# Allegro board ptmd_pcb20141102_2215.brd
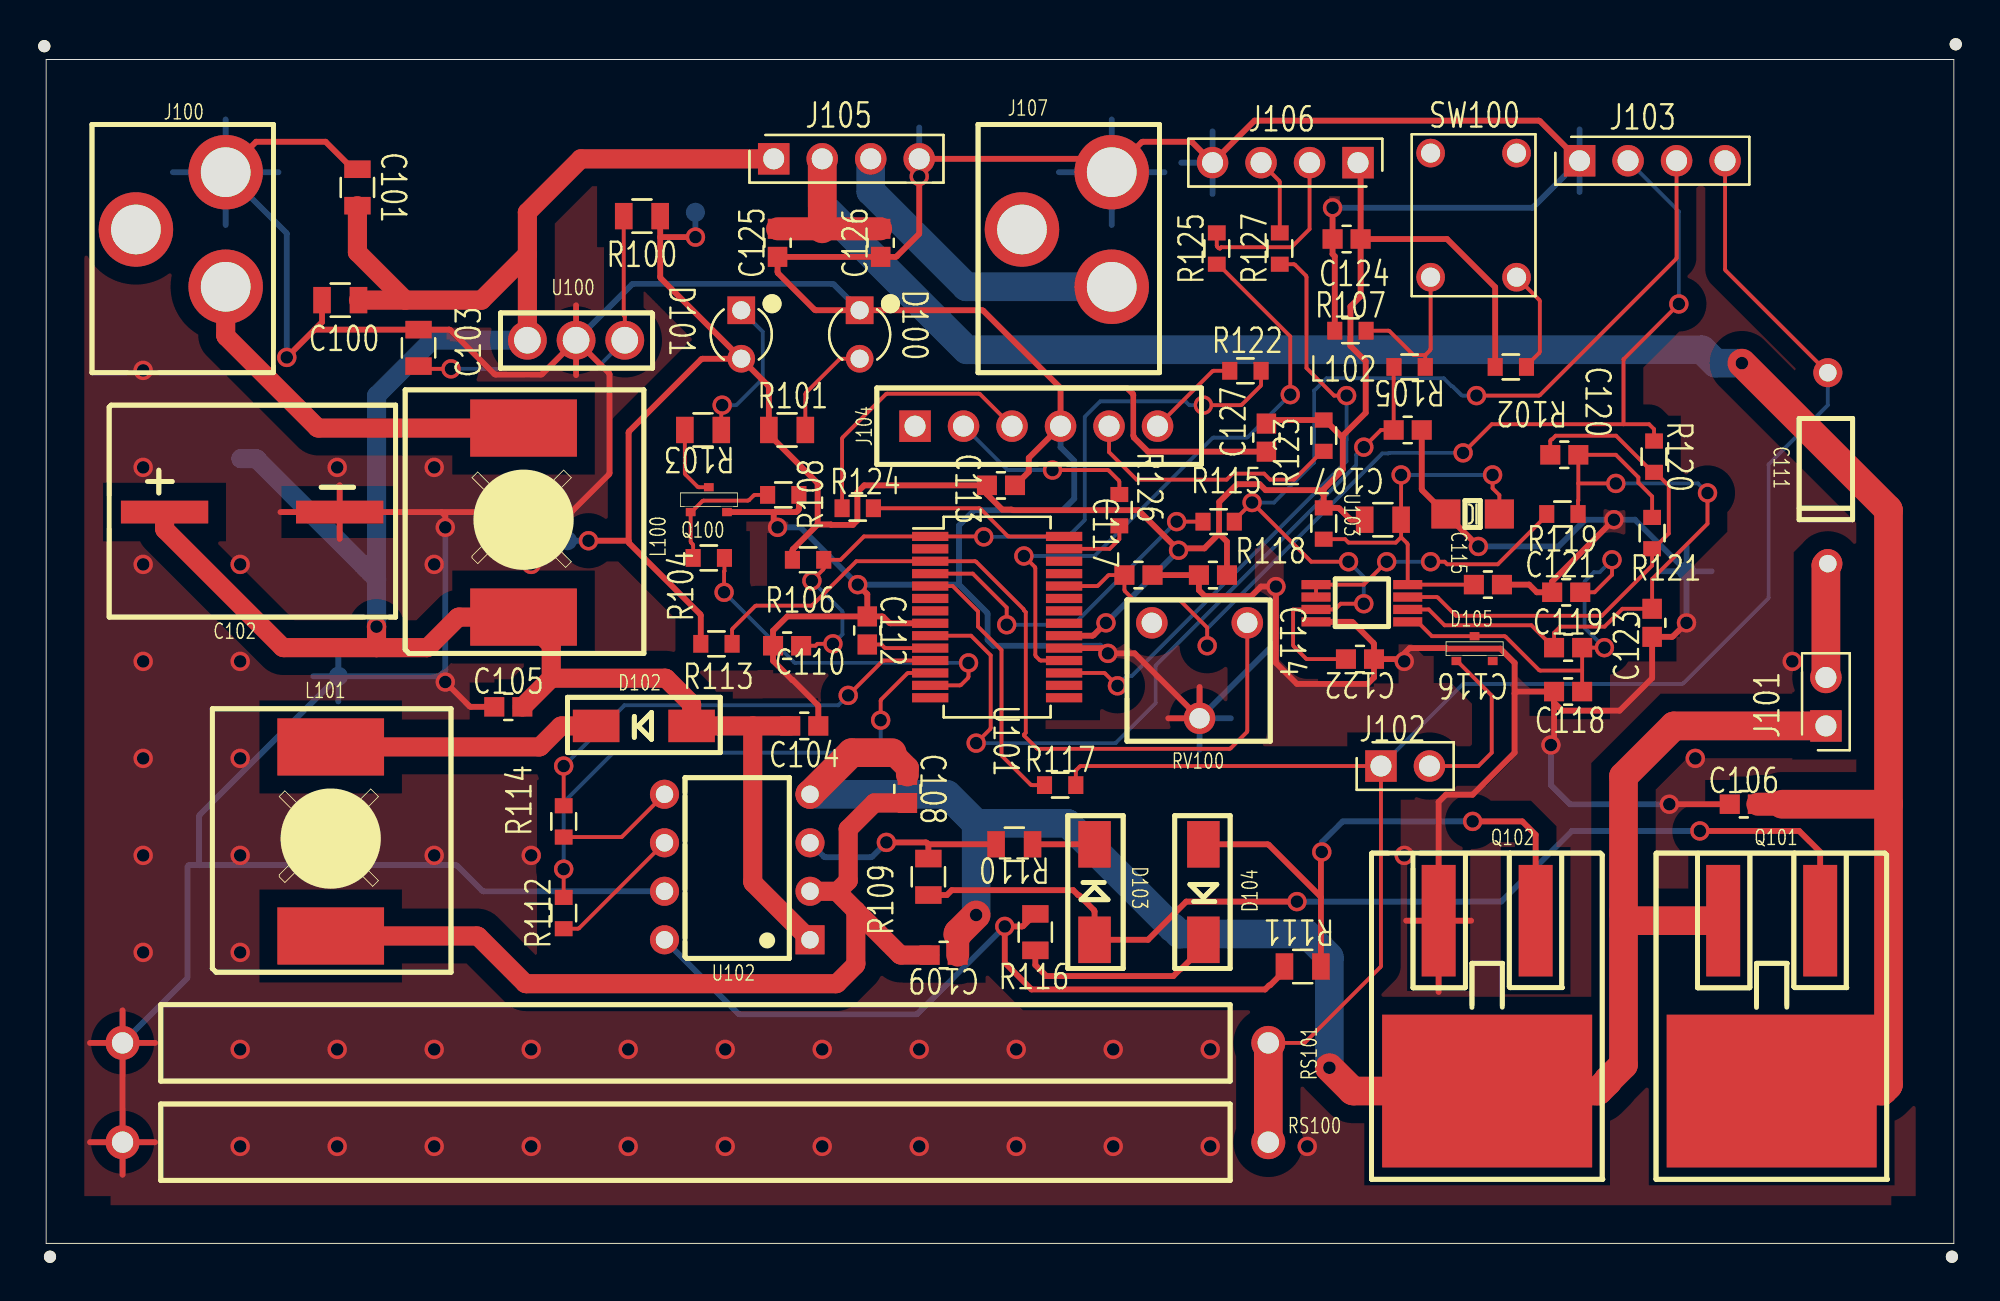
[diagram p0: board, top side]
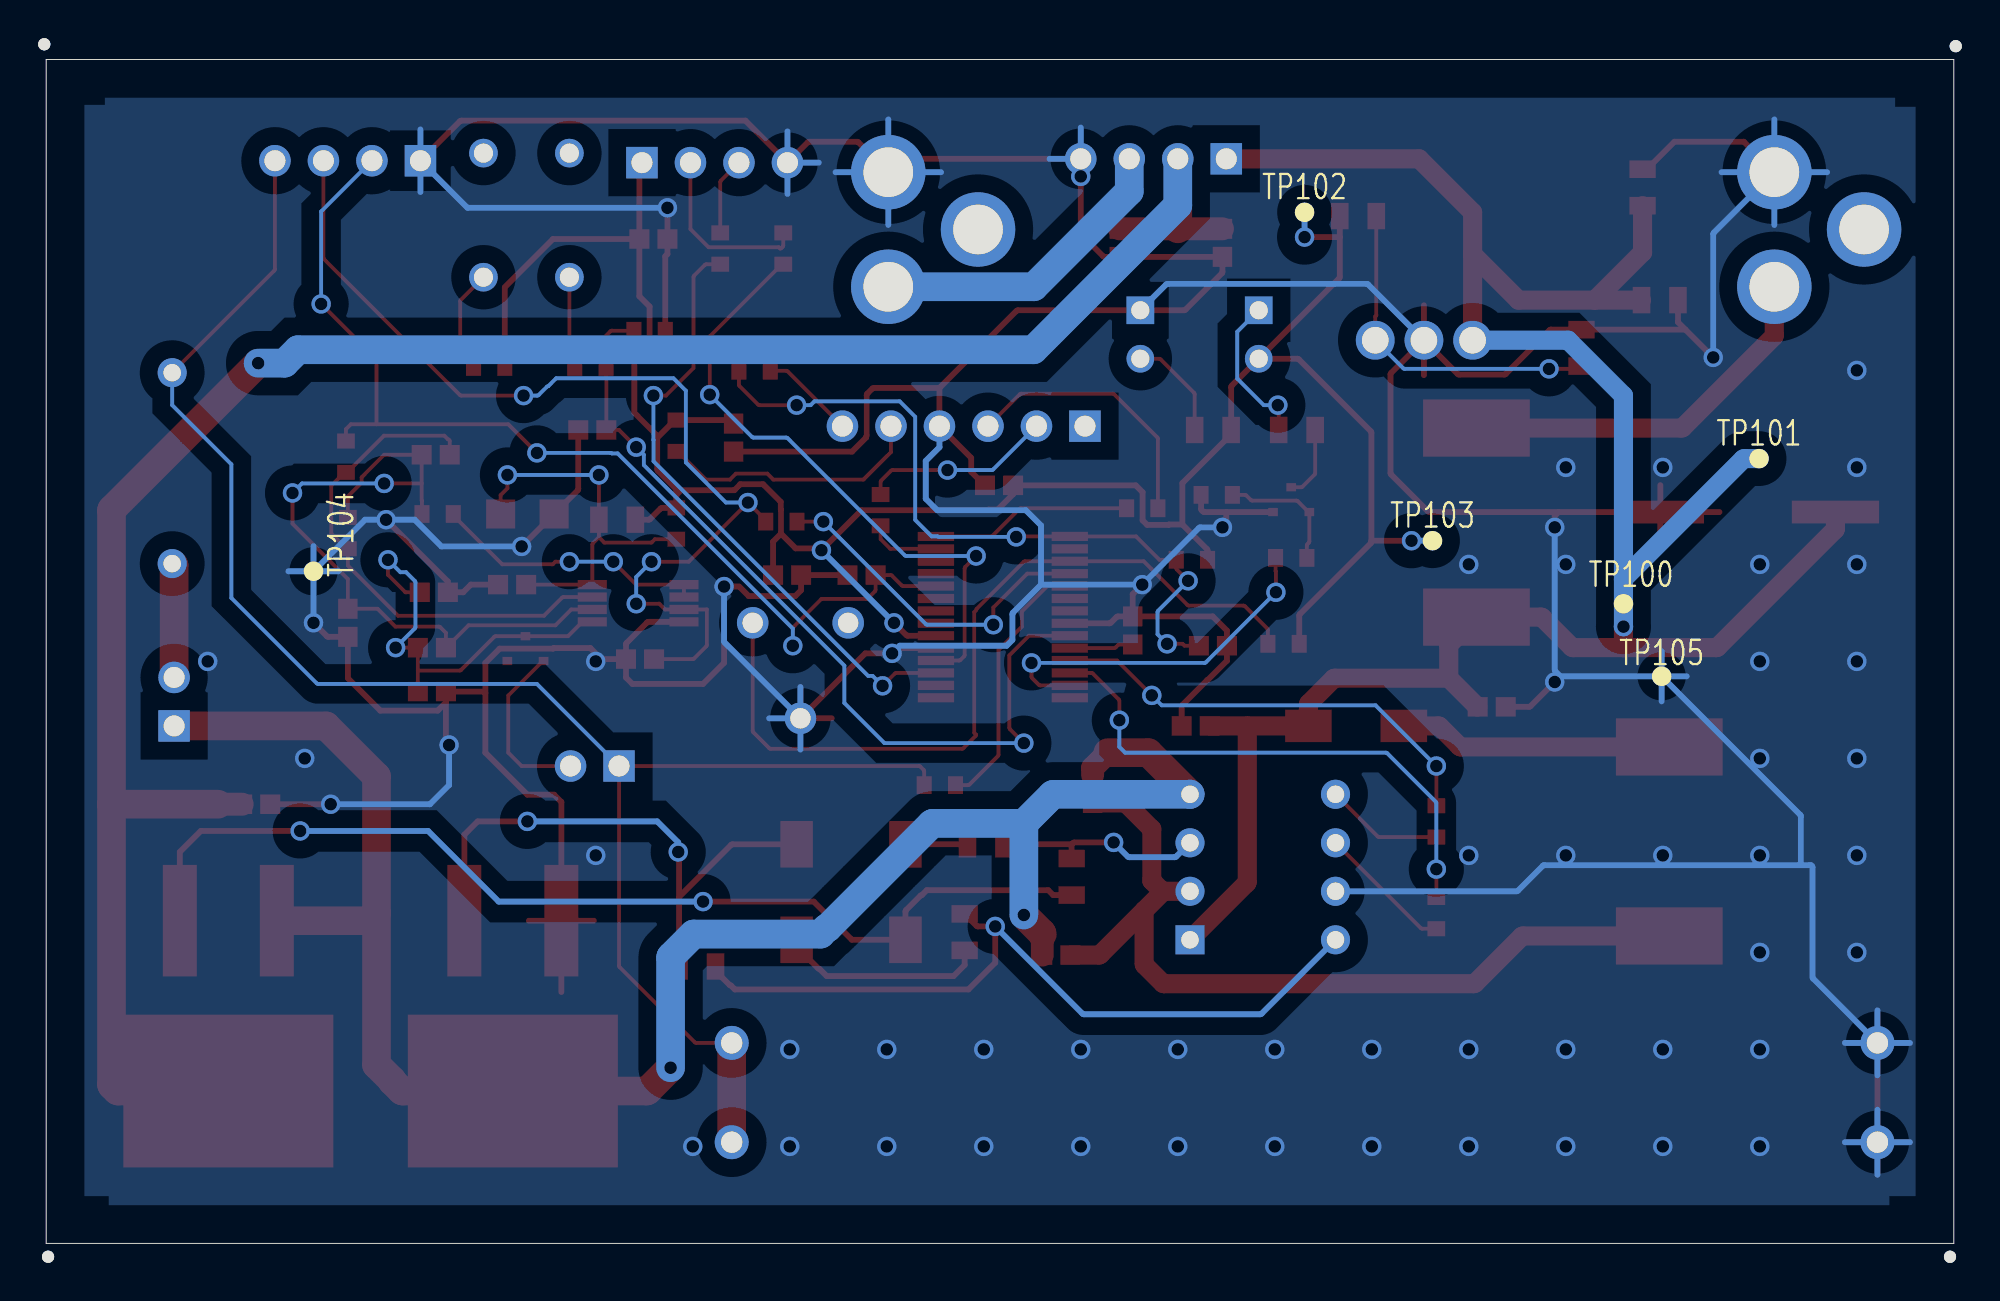
[diagram p1: board, bottom side, seen from below]

Outline 99.9 x 62 mm; copper layers: TOP, BOTTOM. Coordinates in mm from the lower left corner of the outline.
Outline path: 0,62 0,0 99.9,0 99.9,62 0,62

## Design rules (mm)
nets with their own width: min track width 0.305; nets GND IR2011_LO N13254717 N13254741 N13254867 N13255229 N13255269 VCC_5V
nets with their own width: min track width 1; nets N13254415 N13255963 N13257345 VCC_12V
nets with their own width: min track width 1.5; nets N13255311 N13255625 V_EXT_24V/12V VSEN_1

## Placement (name value [footprint] x y rotation side)
C100  10uF  [RES0805]  15.4 49.4 0 top
C101  100nF  [RES0805]  16.3 55.3 270 top
C102  330uF  [ALUMIUM_330UF_TUTAO]  6.2 38.3 0 top
C103  100nF  [RES0805]  19.5 46.9 270 top
C104  100nF  [CAP0603]  39.7 27.1 180 top
C105  100nF  [CAP0603]  24.2 28.1 0 top
C106  100nF  [CAP0603]  88.9 23 0 top
C107  100nF  [CAP0603]  71.3 42.6 180 top
C108  10pF  [CAP0603]  45.1 23.8 270 top
C109  100nF  [CAP0603]  47 15.1 180 top
C110  100nF  [CAP0603]  38.8 31.3 0 top
C111  2uF  [1N4007_TUTAO]  93.3 45.6 270 top
C112  1uF  [CAP0603]  43 32.1 270 top
C113  1uF  [CAP0603]  50 39.7 180 top
C114  100nF  [CAP0603]  61.1 35 0 top
C115  6.8uF  [C1206_TUTAO]  76.1 38.2 180 top
C116  100nF  [CAP0603]  75.5 34.5 180 top
C117  100nF  [CAP0603]  57.2 35 180 top
C118  10pF  [CAP0603]  79.7 28.9 180 top
C119  10pF  [CAP0603]  79.7 31.2 0 top
C120  100nF  [CAP0603]  79.5 41.3 0 top
C121  100nF  [CAP0603]  79.6 34.1 0 top
C122  100nF  [CAP0603]  68.8 30.6 180 top
C123  10pF  [CAP0603]  84.1 32.5 90 top
C124  100nF  [CAP0603]  68.1 52.6 0 top
C125  1uF  [CAP0603]  38.3 52.4 90 top
C126  100nF  [CAP0603]  43.7 52.4 90 top
C127  100nF  [CAP0603]  63.9 42.2 90 top
D100  LED  [LED3MM]  42.6 47.6 270 top
D101  LED  [LED3MM]  36.4 47.6 270 top
D102  SS34  [1N4007_SMD]  28.8 27.1 0 top
D103  1N4007  [1N4007_SMD]  54.9 20.9 270 top
D104  1N4007  [1N4007_SMD]  60.6 15.9 90 top
D105  BAT54/SOT  [SOT23_TUTAO]  74.8 31.8 0 top
J100  Jack DC  [DC-JACK]  9.4 50.1 0 top
J101  Inductor Conn  [HEADER2PINMALE]  93.2 27.1 90 top
J102  Signal Conn  [HEADER2PINMALE]  69.9 25 0 top
J103  SIGNAL_TEST_CONN  [HEADER4PINMALE]  80.3 56.7 0 top
J104  ICSP  [HEADER6PINMALE]  45.5 42.8 0 top
J105  Power_Sel_Conn  [HEADER4PINMALE]  38.1 56.8 0 top
J106  UART_CONN  [HEADER4PINMALE]  68.7 56.6 180 top
J107  Jack DC  [DC-JACK]  55.8 50.1 0 top
L100  L127H-150M  [INDUCTOR_TUTAO]  25 42.7 0 top
L101  L127H-150M  [INDUCTOR_TUTAO]  14.9 26 0 top
L102  Bead  [RES0805]  70 37.9 0 top
NOREF  -  [unnamed]  100 62.8 0 top
NOREF#2  -  [#2]  -6.2 -2.5 90 top
NOREF#3  -  [unnamed]  99.8 -0.7 0 top
NOREF#4  -  [#2]  -2.5 70.2 0 top
NOREF#5  -  [#2]  -349 -266.2 0 top
NOREF#6  -  [#2]  1 80.3 0 top
NOREF#7  -  [#2]  1 81.5 0 top
NOREF#8  -  [#2]  1 1 90 top
NOREF#9  -  [#2]  -349 -266.2 0 top
NOREF#10  -  [unnamed]  0.2 -0.7 0 top
NOREF#11  -  [unnamed]  -0.1 62.7 0 top
Q100  MMBT2222A  [SOT23_TUTAO]  34.7 39.6 0 top
Q101  SUB85N03-07P  [TO263_TUTAO]  92.9 16.9 180 top
Q102  SUB85N03-07P  [TO263_TUTAO]  78 16.9 180 top
R100  0R  [RES0805]  31.2 53.8 0 top
R101  330R  [RES0805]  38.8 42.6 0 top
R102  1K  [RESC0603]  76.7 45.9 180 top
R103  330R  [RES0805]  34.4 42.6 180 top
R104  3.3K  [RESC0603]  34.7 35.9 180 top
R105  100R  [RESC0603]  71.4 45.9 180 top
R106  10K  [RESC0603]  39.9 35.8 180 top
R107  100K  [RESC0603]  68.3 47.8 0 top
R108  10K  [RESC0603]  38.6 39.2 180 top
R109  1K  [RES0805]  46.2 19.2 270 top
R110  100R  [RES0805]  50.7 20.9 180 top
R111  1K  [RES0805]  65.8 14.5 0 top
R112  330R  [RESC0603]  27.1 17.3 90 top
R113  1K  [RESC0603]  35.1 31.4 180 top
R114  330R  [RESC0603]  27.1 22.1 90 top
R115  27R  [RESC0603]  61.4 37.8 0 top
R116  100R  [RES0805]  51.8 16.3 90 top
R117  27R  [RESC0603]  53.1 24 0 top
R118  0R  [RESC0603]  66.9 37.7 90 top
R119  2.2K  [RESC0603]  79.4 38.2 180 top
R120  100R  [RESC0603]  84.2 41.2 270 top
R121  22K  [RESC0603]  84.1 37.2 90 top
R122  100R  [RESC0603]  62.8 45.7 0 top
R123  0R  [RESC0603]  66.9 42.3 90 top
R124  100R  [RESC0603]  42.5 38.5 0 top
R125  100R  [RESC0603]  61.3 52.1 90 top
R126  100R  [RESC0603]  56.2 38.4 270 top
R127  100R  [RESC0603]  64.6 52.1 90 top
RS100  0.22R  [POWER_RES]  4 5.3 0 top
RS101  0.22R  [POWER_RES]  4 10.5 0 top
RV100  1K  [VR3]  60.4 27.5 180 top
SW100  SW_TC_SPST  [BUTTON_KAN0611-1201B]  72.5 50.6 270 top
TP100  TEST POINT  [TP_TP]  17.3 33.5 180 bottom
TP101  TEST POINT  [TP_TP]  10.2 41.1 180 bottom
TP102  TEST POINT  [TP_TP]  34 54 180 bottom
TP103  TEST POINT  [TP_TP]  27.3 36.8 180 bottom
TP104  TEST POINT  [TP_TP]  85.9 35.2 180 bottom
TP105  TEST POINT  [TP_TP]  15.3 29.7 180 bottom
U100  7805/TO  [TO20AB_TUTAO]  25.2 47.3 180 top
U101  PIC16LF1788/9  [SSOP28_TUTAO]  49.8 32.8 270 top
U102  IR2011  [DIP8_TUTAO]  40 15.9 180 top
U103  LMV358IDGKR  [VSSOP_TUTAO]  66.5 34.5 0 top

## Library data of the parts
C100 C101 C103 = C: room: PWR
C102 = CAPACITOR POL: User Part Number: ***; room: PWR
C104-C106 C108 C109 = CAP NP: room: Driver
C107 = CAP NP: room: LED
C110 C112-C114 C117 = CAP NP: room: MCU
C111 = C: User Part Number: ***; room: Driver
C115 = CAP: User Part Number: ***; room: Signal
C116 C118-C123 = CAP NP: room: Signal
C124-C127 = CAP NP: room: Conn
D100 = LED_0: room: PWR
D101 = LED_0
D102 = DIODE_0: User Part Number: ***; room: Driver
D103 D104 = DIODE: User Part Number: ***; room: Driver
D105 = BAT54/SOT_0: User Part Number: ***; room: Signal
J100 = Jack DC: User Part Number: ***; room: PWR
J101 = CON2: room: Driver
J102 = CON2: room: Signal
J103 = CON4: room: TP
J104 = CONNECTOR EDGE 5_0: User Part Number: ***; room: Conn
J105 J106 = CON4: room: Conn
J107 = Jack DC: User Part Number: ***; room: Conn
L100 = CHOKE: User Part Number: ***; room: PWR
L101 = CHOKE: User Part Number: ***; room: Driver
L102 = CHOKE: room: Signal
Q100 = MMBT2222A/SOT_0: User Part Number: ***; room: LED
Q101 Q102 = IRF540N/TO_0: User Part Number: ***; room: Driver
R100 = RESISTOR: room: PWR
R101 = R: room: PWR
R102 R103 R107 R108 = R: room: LED
R104 = RESISTOR_0: room: LED
R105 = RESISTOR: room: LED
R106 R113 R115 R117 = R: room: MCU
R109 R111 R112 R114 = R: room: Driver
R110 R116 = RESISTOR: room: Driver
R118-R121 = RESISTOR: room: Signal
R122-R127 = RESISTOR: room: Conn
RS100 RS101 = R: User Part Number: ***; room: Driver
RV100 = VARISTOR_1: User Part Number: ***; room: MCU
SW100 = SW_TC_SPST: room: LED
TP100-TP105 = TEST POINT: room: TP
U100 = 78XX/TO_0: User Part Number: ***; room: PWR
U101 = PIC16F1788_0: room: MCU
U102 = IR2011: User Part Number: ***; room: Driver
U103 = LMV358/SO: User Part Number: ***; room: Signal

## Footprints (pads in the part's own frame, mm; a bottom-side part is the same pattern mirrored in y, then rotated)
1N4007_SMD
  rect 2.438x1.702 smd: 1(0,0) 2(5,0)
1N4007_TUTAO
  round 1.524 hole 0.914: 1(0,0) 2(10,0)
ALUMIUM_330UF_TUTAO
  rect 4.572x1.194 smd: 1(0,0) 2(9.17,0)
BUTTON_KAN0611-1201B
  round 1.5 hole 1: 1(0,4.5) 2(-6.5,4.5) 3(0,0) 4(-6.5,0)
C1206_TUTAO
  rect 1.524x1.524 smd: 1(0,0) 2(2.8,0)
CAP0603
  rect 1.05x1.02 smd: 1(-0.735,0) 2(0.735,0)
DC-JACK
  round 3.9 hole 2.6: 1(0,0) 2(0,6) 3(-4.7,3)
DIP8_TUTAO
  rect 1.524x1.524 hole 0.914: 1(0,0)
  round 1.524 hole 0.914: 2(0,-2.54) 3(0,-5.08) 4(0,-7.62) 5(7.62,-7.62) 6(7.62,-5.08) 7(7.62,-2.54) 8(7.62,0)
HEADER2PINMALE
  rect 1.65x1.65 hole 1.1: 1(0,0)
  round 1.65 hole 1.1: 2(2.54,0)
HEADER4PINMALE
  rect 1.65x1.65 hole 1.1: 1(0,0)
  round 1.65 hole 1.1: 2(2.54,0) 3(5.08,0) 4(7.62,0)
HEADER6PINMALE
  rect 1.65x1.65 hole 1.1: 1(0,0)
  round 1.65 hole 1.1: 2(2.54,0) 3(5.08,0) 4(7.62,0) 5(10.16,0) 6(12.7,0)
INDUCTOR_TUTAO
  rect 5.588x2.997 smd: 1(0,0) 2(0,-9.9)
LED3MM
  round 1.45 hole 0.95: A(1.27,0)
  rect 1.45x1.45 hole 0.95: C(-1.27,0)
POWER_RES
  round 1.778 hole 1.118: 1(0,0) 2(60,0)
RES0805
  rect 0.92x1.38 smd: 1(-0.955,0) 2(0.955,0)
RESC0603
  rect 0.79x0.93 smd: 1(-0.82,0) 2(0.82,0)
SOT23_TUTAO
  rect 0.508x0.432 smd: 1(-0.95,-1.3) 2(0.95,-1.3) 3(0,0)
SSOP28_TUTAO
  rect 0.48x1.9 smd: 1(-4.225,-3.505) 2(-3.575,-3.505) 3(-2.925,-3.505) 4(-2.275,-3.505) 5(-1.625,-3.505) 6(-0.975,-3.505) 7(-0.325,-3.505) 8(0.325,-3.505) 9(0.975,-3.505) 10(1.625,-3.505) 11(2.275,-3.505) 12(2.925,-3.505) 13(3.575,-3.505) 14(4.225,-3.505) 15(4.225,3.505) 16(3.575,3.505) 17(2.925,3.505) 18(2.275,3.505) 19(1.625,3.505) 20(0.975,3.505) 21(0.325,3.505) 22(-0.325,3.505) 23(-0.975,3.505) 24(-1.625,3.505) 25(-2.275,3.505) 26(-2.925,3.505) 27(-3.575,3.505) 28(-4.225,3.505)
TO20AB_TUTAO
  round 2.032 hole 1.397: 1(0,0) 2(-2.55,0) 3(-5.1,0)
TO263_TUTAO
  rect 1.778x5.842 smd: 1(0,0) 3(5.08,0)
  rect 10.998x8.001 smd: 2(2.54,8.921)
TP_TP
  round 1 smd: 1(0,0)
unnamed
  round 0.635 hole 3.175 unplated: (0,0)
VR3
  round 1.651 hole 1.067: 1(-2.5,-5) 2(0,0) 3(2.5,-5)
VSSOP_TUTAO
  rect 1.524x0.483 smd: 1(0,0) 2(0,-0.65) 3(0,-1.3) 4(0,-1.95) 5(4.8,-1.95) 6(4.8,-1.3) 7(4.8,-0.65) 8(4.8,0)

## Nets
2.5V: R113.1 RV100.1 U101.3(C1IN1-)
GND: C100.1 C101.1 C102.2 C103.1 C104.1 C105.1 C106.1 C107.1 C110.1 C112.1 C113.1 C114.1 C115.2 C116.1 C117.1 C118.2 C121.1 C122.1 C123.1 C124.1 C125.1 C126.1 C127.1 D100.C(CATHODE) J100.2(GND) J103.1 J104.4 J105.4 J106.4 J107.2(GND) Q100.2(E) Q102.3(S) R107.1 R108.1 RS100.1 RS101.1 RV100.2 TP104.1 TP105.1 U100.2(GND) U101.8(VSS) U101.19(VSS1) U102.7(COM) U103.4(-VCC)
V_EXT_24V/12V: C106.2 C125.2 C126.2 J105.2 Q101.2(D)
VCC_5V: C113.2 C114.2 C124.2 C127.2 D101.A(ANODE) J106.1 L102.1 R100.2 R101.1 R102.2 R106.2 R113.2 R118.2 R123.2 TP102.1 TP103.1 U101.20(VDD)
VCC_12V: C100.2 C101.2 C102.1 C104.2 C105.2 D102.2(A) J105.1 L100.2 TP100.1 TP101.1 U100.1(VIN) U102.1(VCC)
HI_INPUT: R114.2 U101.11(PSMC1A)
ICSPCLK: R126.2 U101.27(ICSPCLK)
ICSPDAT: R124.2 U101.28(ICSPDAT)
IR2011_LO: R111.1 R116.2 U102.8(LO)
LED: R104.1(2) U101.13(CCP1)
LI_INPUT: R112.2 U101.12(PSMC1B)
RESET: C110.2 R106.1 R122.2 U101.1(VPP/M\C\L\R\)
RX: R125.1 U101.18(RX)
TX: R127.1 U101.17(TX)
UCAL: C107.2 R105.2 U101.9(RA7)
VOFFSET: C122.2 J103.3 R115.2 U103.3(+VIN)
VSEN: C117.2 J103.2 R120.1 U101.24(AN9)
VSEN_1: C111.1 J102.1 J103.4 R117.2 RS100.2 RS101.2
N13254239: J105.3 J107.1(VCC)
N13254275: C120.1 R120.2 R121.1 U103.7(OUTPUT)
N13254303: C115.1 C116.2 L102.2 R118.1 U103.8(+VCC)
N13254321: C118.1 C119.2 C121.2 D105.3(CATHODE) U103.5(+VIN)
N13254399: C119.1 C120.2 C123.2 R119.1 R121.2 U103.6(-VIN)
N13254415: C108.2 C109.2 L101.2 U102.2(VB)
N13254529: C112.2 U101.10(VCAP)
N13254717: D103.1(K) R110.1
N13254741: D103.2(A) Q101.1(G) R109.2
N13254867: D104.2(A) Q102.1(G) R111.2
N13254889: C103.2 R100.1 U100.3(VOUT)
N13255179: D105.1(ANODE) J102.2
N13255229: D104.1(K) R116.1
N13255269: R109.1 R110.2 U102.3(HO)
N13255311: C111.2 J101.2
N13255335: R102.1 SW100.1
N13255523: Q100.1(B) R104.2(1) R108.2
N13255625: C108.1 C109.1 J101.1 Q101.3(S) Q102.2(D) U102.4(VS)
N13255733: R119.2 U103.1(OUTPUT) U103.2(-VIN)
N13255819: J104.6 R122.1
N13255963: D102.1(K) L101.1
N13256241: R105.1 R107.2 SW100.3
N13256275: R115.1 U101.4(C2IN0+)
N13256585: R112.1 U102.6(LIN)
N13256589: R114.1 U102.5(HIN)
N13257127: Q100.3(C) R103.2
N13257143: D101.C(CATHODE) R103.1
N13257239: J106.2 R125.2
N13257243: J106.3 R127.2
N13257333: D100.A(ANODE) R101.2
N13257345: J100.1(VCC) L100.1
N13257381: J104.5 R123.1
N13257397: J104.3 R124.1
N13257431: J104.2 R126.1
N13260157: R117.1 U101.5(C1IN1+)

Pads without a net: D105 2; J100 3; J104 1; J107 3; RV100 3; SW100 2 4; U101 2 6 7 14 15 16 21 22 23 25 26

## Via types
v1: diameter 1.016, hole 0.66, TOP to BOTTOM, 110 vias

## Routing (per net, layer and track width the routed paths; a pad name or vN(x,y) marks a point on that pad's centre or on a via; arc(x,y) is an arc through that point)
2.5V: length 43.3
  TOP w0.2: R113.1 35.92,32.13 arc(35.93,32.17) 35.95,32.2 37.12,33.37 arc(37.15,33.39) 37.19,33.4 40.06,33.4 arc(40.1,33.41) 40.13,33.43 42.03,35.33 42.43,35.73 U101.3 48.63,35.73 arc(48.67,35.72) 48.7,35.7 51.17,33.23 arc(51.19,33.2) 51.2,33.16 51.3,33.06 51.3,26.74 51.2,26.64 arc(51.21,26.6) 51.23,26.57 51.87,25.93 arc(51.9,25.91) 51.94,25.9 61.96,25.9 arc(62,25.91) 62.03,25.93 62.87,26.77 arc(62.89,26.8) 62.9,26.84 RV100.1
GND: length 526.4
  TOP w0.29: 56.93,42.31 56.93,44.43
  TOP w0.305: C122.1 69.54,31.37 arc(69.53,31.41) 69.51,31.44 68.43,32.52 arc(68.4,32.54) 68.36,32.55 U103.4 ; C122.1 69.54,29.63 69.2,29.3 65.5,29.3 64.4,30.4 v1(64.4,34.4) 63.61,34.4 63.11,33.9 60.68,33.9 60.37,34.21 C114.1 C117.1 ; C122.1 70.82,30.6 71.4,31.18 73.33,31.18 73.36,31.15 76.15,31.15 76.9,30.4 76.9,28.8 ; 15.37,36.89 C102.2 ; C102.2 12.27,38.3 ; C102.2 20.7,38.3 ; C102.2 15.37,39.71 ; Q102.3 74.62,16.9 ; Q102.3 72.92,23.12 73.3,23.5 74.7,23.5 76.9,25.7 76.9,28.8 ; Q102.3 72.92,13.17 ; Q102.3 71.22,16.9 ; 20.7,38.3 27.46,38.3 arc(27.5,38.31) 27.53,38.33 29.47,40.27 arc(29.49,40.3) 29.5,40.34 29.5,45.51 arc(29.49,45.55) 29.47,45.58 U100.2 ; 20.7,38.3 20.9,38.1 v1(20.9,37.5) ; J103.1 78.23,58.77 arc(78.2,58.79) 78.16,58.8 63.28,58.8 J106.4 60.01,57.67 arc(59.98,57.69) 59.94,57.69 57.44,57.69 arc(57.4,57.69) 57.37,57.67 J107.2 55.13,56.77 arc(55.1,56.79) 55.06,56.8 J105.4 v1(45.72,55.88) 45.72,52.91 arc(45.71,52.87) 45.69,52.84 44.54,51.69 arc(44.51,51.67) 44.47,51.67 C126.1 C125.1 38.3,50.88 arc(38.31,50.84) 38.33,50.81 40.24,48.9 arc(40.27,48.88) 40.31,48.87 D100.C 49.01,48.87 arc(49.05,48.86) 49.08,48.84 53.12,44.8 ; U101.8 44.22,32.48 arc(44.18,32.48) 44.15,32.5 43.84,32.81 arc(43.81,32.83) 43.77,32.83 C112.1 ; 78.96,28.33 78.96,26.26 v1(78.8,26.1) ; 78.96,28.33 C118.2 77,28.9 76.9,28.8 ; 78.96,28.33 79.39,27.9 82.4,27.9 84.1,29.6 C123.1 85.12,31.76 arc(85.16,31.77) 85.19,31.79 v1(85.9,32.5) ; U100.2 27.75,49.13 ; U100.2 27.75,45.47 ; U100.2 25.98,45.53 arc(25.95,45.51) 25.91,45.5 23.54,45.5 arc(23.5,45.51) 23.47,45.53 21.17,47.83 arc(21.14,47.85) 21.1,47.86 14.06,47.86 ; v1(38.3,37.5) 38.13,37.67 arc(38.11,37.7) 38.1,37.74 38.1,38.3 ; C116.1 77.66,34.5 78.06,34.1 C121.1 78.87,34.67 v1(82.1,37.9) ; RS101.1 5.7,10.5 ; RS101.1 RS100.1 ; RS101.1 4,12.2 ; RS101.1 2.3,10.5 ; RS100.1 4,3.6 ; RS100.1 5.7,5.3 ; RS100.1 2.3,5.3 ; RV100.2 57,30.9 v1(55.6,30.9) 55.32,31.18 U101.19 ; RV100.2 60.4,29.14 ; RV100.2 58.76,27.5 ; C104.1 40.44,28.12 arc(40.43,28.16) 40.41,28.19 39.09,29.51 39.07,29.51 38.06,30.51 C110.1 38.06,32.09 38.81,32.83 C112.1 ; 14.06,47.86 v1(12.6,46.4) ; 14.06,47.86 14.44,48.25 C100.1 ; C101.1 16.07,56.25 14.63,57.69 10.99,57.69 J100.2 ; C127.1 57.7,41.46 56.96,42.21 56.96,42.24 arc(56.94,42.27) 56.93,42.31 ; R107.1 67.48,51.7 67.37,51.81 C124.1 v1(67.37,54.24) ; C113.1 50.75,39.7 51.46,40.41 51.46,41.14 J104.4 53.12,44.8 ; C112.1 43,34 v1(42.5,34.5) ; 53.12,44.8 56.56,44.8 arc(56.6,44.79) 56.63,44.77 56.9,44.5 arc(56.92,44.47) 56.93,44.43 ; C106.1 v1(85,23) ; 38.1,38.3 39.25,38.3 arc(39.29,38.31) 39.32,38.33 39.39,38.4 arc(39.41,38.43) 39.42,38.47 R108.1 ; 38.1,38.3 Q100.2 ; v1(75,36.5) C115.2 72.06,39.44 arc(72.04,39.47) 72.04,39.51 C107.1 ; v1(20.9,29.4) 22.17,28.13 arc(22.2,28.11) 22.24,28.1 C105.1
  BOTTOM w0.305: J100.2 9.4,58.86 ; J100.2 9.4,53.34 ; J100.2 12.16,56.1 ; J100.2 6.64,56.1 ; J100.2 12.57,52.93 arc(12.59,52.9) 12.6,52.86 v1(12.6,46.4) ; 8.01,19.81 8.01,22.37 arc(8.02,22.41) 8.04,22.44 TP105.1 ; 8.01,19.81 7.5,19.81 arc(7.43,19.78) 7.4,19.71 7.4,13.94 arc(7.39,13.9) 7.37,13.87 RS101.1 ; 8.01,19.81 21.45,19.81 arc(21.49,19.8) 21.52,19.78 22.83,18.47 arc(22.86,18.45) 22.9,18.44 U102.7 ; J103.1 77.83,54.24 v1(67.37,54.24) ; J103.1 80.3,55.06 ; J103.1 80.3,58.34 ; 47.8,34.5 47.8,37.6 48.6,38.4 53.24,38.4 53.84,39 53.84,40.98 53.12,41.7 J104.4 ; 47.8,34.5 49.27,33.03 arc(49.29,33) 49.3,32.96 49.3,31.6 49.6,31.3 55.2,31.3 v1(55.6,30.9) ; 47.8,34.5 v1(42.5,34.5) 39.53,37.47 arc(39.5,37.49) 39.46,37.5 v1(38.3,37.5) ; U100.2 30.67,50.22 arc(30.7,50.24) 30.74,50.25 41.18,50.25 arc(41.22,50.24) 41.25,50.22 D100.C ; 2.3,10.5 RS101.1 ; RS101.1 4,8.8 ; RS101.1 5.7,10.5 ; RS101.1 4,12.2 ; TP104.1 85.9,36.51 ; TP104.1 84.59,35.2 ; TP104.1 83.2,37.9 v1(82.1,37.9) 80.6,37.9 79.2,36.5 v1(75,36.5) ; TP104.1 v1(85.9,32.5) ; TP104.1 87.21,35.2 ; 20.6,29.7 TP105.1 ; 20.6,29.7 20.87,29.97 arc(20.89,30) 20.9,30.04 v1(20.9,37.5) ; 20.6,29.7 v1(20.9,29.4) ; TP105.1 15.3,31.01 ; TP105.1 15.3,28.39 ; TP105.1 13.99,29.7 ; J107.2 55.8,58.86 ; J107.2 58.56,56.1 ; J107.2 55.8,53.34 ; J107.2 53.04,56.1 ; J105.4 45.72,58.44 ; J105.4 47.36,56.8 ; J105.4 v1(45.72,55.88) ; v1(85,23) 79.8,23 78.8,24 v1(78.8,26.1) ; RV100.2 64.37,31.47 arc(64.39,31.5) 64.4,31.54 v1(64.4,34.4) ; RV100.2 62.04,27.5 ; RV100.2 60.4,29.14 ; RV100.2 60.4,25.86 ; 61.08,54.96 J106.4 ; J106.4 59.44,56.6 ; J106.4 61.08,58.24 ; 2.3,5.3 RS100.1 ; RS100.1 5.7,5.3 ; RS100.1 4,7 ; RS100.1 4,3.6
  vias: v1(5.08,45.72) v1(5.08,40.64) v1(5.08,35.56) v1(5.08,30.48) v1(5.08,25.4) v1(5.08,20.32) v1(5.08,15.24) v1(10.16,35.56) v1(10.16,30.48) v1(10.16,25.4) v1(10.16,20.32) v1(10.16,15.24) v1(10.16,10.16) v1(10.16,5.08) v1(15.24,40.64) v1(15.24,20.32) v1(15.24,10.16) v1(15.24,5.08) v1(20.32,40.64) v1(20.32,35.56) v1(20.32,20.32) v1(20.32,10.16) v1(20.32,5.08) v1(25.4,35.56) v1(25.4,20.32) v1(25.4,10.16) v1(25.4,5.08) v1(30.48,10.16) v1(30.48,5.08) v1(35.56,10.16) v1(35.56,5.08) v1(40.64,10.16) v1(40.64,5.08) v1(45.72,10.16) v1(45.72,5.08) v1(50.8,10.16) v1(50.8,5.08) v1(55.88,10.16) v1(55.88,5.08) v1(60.96,10.16) v1(60.96,5.08) v1(66.04,5.08) v1(71.12,30.48) v1(71.12,20.32) v1(86.36,25.4) v1(91.44,30.48)
V_EXT_24V/12V: length 117.2
  TOP w1.2: C125.2 C126.2 ; 90.9,23 C106.2
  TOP w1.5: 96.48,23 96.48,8.34 arc(96.47,8.3) 96.45,8.27 96.19,8.01 arc(96.16,7.99) 96.12,7.98 Q101.2 ; 96.48,23 96.48,38.38 arc(96.47,38.42) 96.45,38.45 v1(88.8,46.1) ; 96.48,23 90.9,23 ; 40.64,53.13 J105.2
  BOTTOM w1.5: v1(88.8,46.1) 87.42,46.1 86.71,46.8 48.2,46.8 40.64,54.36 J105.2
VCC_5V: length 129.9
  TOP w0.305: D101.A 34.37,46.33 arc(34.33,46.32) 34.3,46.3 30.53,42.53 arc(30.51,42.5) 30.5,42.46 30.5,36.8 ; D101.A 32.18,50.55 arc(32.16,50.58) 32.15,50.62 32.15,52.7 ; D101.A 37.82,44.91 arc(37.84,44.88) 37.85,44.84 R101.1 37.85,42.37 40.4,39.81 40.4,37.65 ; U101.20 54.78,31.82 arc(54.82,31.83) 54.85,31.85 v1(55.5,32.5) ; C124.2 68.83,49.6 68.3,49.06 68.3,47 69.1,46.2 69.1,43.5 67.9,42.3 67.9,42.19 ; C124.2 68.83,56.42 arc(68.83,56.46) 68.81,56.49 J106.1 ; C124.2 73.36,52.6 75.88,50.08 R102.2 ; 40.4,37.65 41.1,37.65 41.12,37.63 42.24,37.63 42.48,37.87 42.48,39.34 42.84,39.7 C113.2 49.26,39.24 50.07,38.43 50.55,38.43 arc(50.58,38.41) 50.62,38.4 57.2,38.4 v1(59.3,36.3) 59.4,36.4 60.65,36.4 61.42,37.17 ; 40.4,37.65 39.11,36.36 arc(39.09,36.33) 39.08,36.29 R106.2 ; C127.2 64.08,43.12 R123.2 66.93,43.12 arc(66.97,43.11) 67,43.09 67.9,42.19 ; 32.15,52.7 v1(34,52.7) ; 32.15,52.7 R100.2 ; 61.42,37.17 61.83,36.75 C114.2 ; 61.42,37.17 61.42,38.43 61.43,38.44 61.43,38.83 62.36,39.76 63.55,39.76 63.86,39.45 66.65,39.45 66.9,39.19 ; 66.9,39.19 66.9,39.5 67.87,40.47 arc(67.89,40.5) 67.9,40.54 67.9,42.19 ; 66.9,39.19 R118.2 67.64,38.52 arc(67.68,38.51) 67.71,38.49 68.28,37.93 arc(68.31,37.91) 68.35,37.9 L102.1 ; 30.5,36.8 v1(28.4,36.8) ; 30.5,36.8 30.5,36.74 arc(30.51,36.7) 30.53,36.67 34.25,32.95 arc(34.27,32.92) 34.28,32.88 R113.2
  BOTTOM w0.305: TP103.1 v1(28.4,36.8) ; v1(55.5,32.5) v1(59.3,36.3) ; TP102.1 v1(34,52.7)
VCC_12V: length 124.1
  TOP w1: 26.45,29.6 26.45,31.31 arc(26.44,31.35) 26.42,31.38 L100.2 21.62,32.8 arc(21.58,32.79) 21.55,32.77 20.01,31.23 arc(19.98,31.21) 19.94,31.2 17.3,31.2 ; 26.45,29.6 32.41,29.6 arc(32.45,29.59) 32.49,29.57 33.77,28.29 arc(33.79,28.25) 33.8,28.21 D102.2 37,27.1 ; 26.45,29.6 24.95,28.1 C105.2 ; 18.8,49.4 16.3,51.9 C101.2 ; 18.8,49.4 22.8,49.4 25.2,51.8 ; 18.8,49.4 16.36,49.4 ; 17.3,31.2 v1(17.3,32.3) ; 17.3,31.2 12.44,31.2 arc(12.4,31.21) 12.37,31.23 6.23,37.37 arc(6.21,37.4) 6.2,37.44 C102.1 ; 37,27.1 37,18.94 arc(37.01,18.9) 37.03,18.87 U102.1 ; 37,27.1 C104.2 ; 25.2,51.8 25.2,54 28,56.8 J105.1 ; 25.2,51.8 U100.1
  BOTTOM w1: v1(17.3,32.3) TP100.1 17.3,34.76 ; TP101.1 10.96,41.1 arc(11,41.09) 11.03,41.07 17.27,34.83 arc(17.29,34.8) 17.3,34.76 ; 17.3,34.76 17.3,44.4 20.2,47.3 U100.1
HI_INPUT: length 23.6
  TOP w0.2: 46.3,30.52 43.82,30.52 v1(42,28.7) ; v1(27.1,25) R114.2
  BOTTOM w0.2: v1(42,28.7) 41.48,28.18 30.28,28.18 v1(27.1,25)
ICSPCLK: length 3.8
  TOP w0.2: U101.27 55.69,36.38 56.2,36.88 R126.2
ICSPDAT: length 10.6
  TOP w0.2: 53.31,37.02 50.42,37.02 arc(50.38,37.03) 50.35,37.05 48.93,38.47 arc(48.9,38.49) 48.86,38.5 R124.2
IR2011_LO: length 40.9
  TOP w0.305: R111.1 64.85,14.31 arc(64.84,14.27) 64.82,14.24 64.11,13.53 arc(64.08,13.51) 64.04,13.51 63.83,13.3 51.6,13.3 50.2,14.7 v1(50.2,16.6) 51.1,16.6 arc(51.14,16.61) 51.17,16.63 R116.2
  BOTTOM w0.305: U102.8 36.25,12.03 arc(36.28,12.01) 36.32,12 45.56,12 arc(45.6,12.01) 45.63,12.03 v1(50.2,16.6)
LED: length 19.1
  TOP w0.2: v1(48.3,30.4) 48.3,29.68 arc(48.29,29.64) 48.27,29.61 47.92,29.25 arc(47.88,29.23) 47.85,29.23 U101.13 ; R104.1 35.52,35.21 35.5,35.19 v1(35.5,34.1)
  BOTTOM w0.2: v1(48.3,30.4) 39.24,30.4 arc(39.2,30.41) 39.17,30.43 v1(35.5,34.1)
LI_INPUT: length 28.4
  TOP w0.2: v1(27.1,19.6) R112.2 ; v1(43.7,27.4) 43.7,28.42 arc(43.71,28.45) 43.73,28.49 45.09,29.85 arc(45.12,29.87) 45.16,29.88 U101.12
  BOTTOM w0.2: v1(43.7,27.4) 43.7,26 43.4,25.7 29.74,25.7 arc(29.7,25.69) 29.67,25.67 27.13,23.13 arc(27.11,23.1) 27.1,23.06 v1(27.1,19.6)
RESET: length 38
  TOP w0.2: R122.2 63.62,44.97 arc(63.61,44.93) 63.59,44.9 62.62,43.93 arc(62.59,43.91) 62.55,43.9 v1(60.6,43.9) ; v1(41.2,31.4) 40.39,31.4 40.29,31.3 C110.2 ; v1(40.1,34.7) 40.69,35.29 arc(40.71,35.32) 40.72,35.36 R106.1 41.6,35.8 42.82,37.02 49.04,37.02 arc(49.07,37.02) v1(49.1,37)
  BOTTOM w0.2: v1(40.1,34.7) 41.67,33.13 arc(41.69,33.1) 41.7,33.06 41.7,31.9 v1(41.2,31.4) ; v1(60.6,43.9) 59.87,43.9 59.67,44.1 55.2,44.1 54.39,43.29 54.39,37.89 53.53,37.03 53.22,37.03 arc(53.19,37.01) 53.15,37 v1(49.1,37)
RX: length 33
  TOP w0.2: v1(51.2,36) 51.77,35.43 arc(51.79,35.4) 51.8,35.36 51.8,30.82 arc(51.81,30.78) 51.83,30.75 52.02,30.55 arc(52.05,30.53) 52.09,30.52 53.31,30.52 ; R125.1 61.37,51.28 65.15,47.5 v1(65.15,44.45)
  BOTTOM w0.2: v1(65.15,44.45) 62.93,42.23 arc(62.9,42.21) 62.86,42.2 61.14,42.2 arc(61.1,42.19) 61.07,42.17 54.93,36.03 arc(54.9,36.01) 54.86,36 v1(51.2,36)
TX: length 32.5
  TOP w0.2: U101.17 55.38,29.88 arc(55.42,29.87) 55.45,29.85 v1(56.1,29.2) ; v1(68.1,44.4) 67.44,44.4 66,45.84 66,50.61 arc(65.99,50.65) 65.97,50.68 65.4,51.25 arc(65.37,51.27) 65.33,51.28 R127.1
  BOTTOM w0.2: v1(56.1,29.2) 56.62,29.72 56.85,29.72 68.09,40.96 68.09,42.08 68.1,42.08 v1(68.1,44.4)
UCAL: length 41.9
  TOP w0.2: U101.9 48.43,31.82 49.46,30.8 49.46,27 arc(49.45,26.97) 49.43,26.93 v1(48.7,26.2) ; v1(69,41.7) 69.9,42.6 C107.2 70.56,45.86 arc(70.57,45.88) R105.2
  BOTTOM w0.2: v1(48.7,26.2) 56,26.2 58.1,28.3 58.1,30.26 68.6,40.76 68.6,41.3 v1(69,41.7)
VOFFSET: length 54.6
  TOP w0.2: v1(74.9,44.4) 78.16,44.4 arc(78.2,44.41) 78.23,44.43 85.35,51.55 arc(85.37,51.58) 85.38,51.62 J103.3 ; R115.2 62.22,37.83 arc(62.23,37.87) 62.25,37.9 v1(63.15,38.8) 66.25,35.7 v1(68.2,35.7) ; C122.2 66.04,30.6 arc(66,30.61) 65.97,30.63 65.33,31.27 arc(65.31,31.3) 65.3,31.34 65.3,33.2 U103.3 67.49,33.2 67.79,33.5 v1(69,33.5)
  BOTTOM w0.2: v1(63.15,38.8) 64.3,38.8 66.4,40.9 66.4,44.66 67.05,45.31 73.19,45.31 73.6,44.9 arc(73.63,44.89) 73.67,44.87 74.11,44.43 arc(74.14,44.41) 74.18,44.4 v1(74.9,44.4) ; v1(68.2,35.7) 69,34.9 v1(69,33.5)
VSEN: length 55.8
  TOP w0.2: R120.1 84.2,42.64 83.94,42.9 82.6,42.9 ; v1(60.8,31.3) 60.8,32.25 59.3,33.75 56.94,33.75 arc(56.9,33.76) 56.87,33.78 56.49,34.16 arc(56.47,34.19) 56.46,34.23 C117.2 55.68,35 arc(55.64,34.99) 55.61,34.97 55.09,34.45 arc(55.06,34.43) 55.02,34.43 U101.24 ; 82.6,42.9 75.7,42.9 v1(74.2,41.4) ; 82.6,42.9 82.6,46.3 v1(85.5,49.2)
  BOTTOM w0.2: v1(85.5,49.2) 85.5,54.04 J103.2 ; v1(74.2,41.4) 70.34,41.4 arc(70.3,41.39) 70.27,41.37 69.97,41.37 60.8,32.2 v1(60.8,31.3)
VSEN_1: length 90.4
  TOP w0.2: C111.1 87.95,50.95 arc(87.93,50.98) 87.92,51.02 J103.4 ; R117.2 53.92,24.73 arc(53.93,24.77) 53.95,24.8 54.12,24.97 arc(54.15,24.99) 54.19,25 J102.1 69.9,14.54 arc(69.89,14.5) 69.87,14.47 65.93,10.53 arc(65.9,10.51) 65.86,10.5 RS101.2
  TOP w1.5: RS100.2 RS101.2
  BOTTOM w0.2: C111.1 93.3,43.9 90.2,40.8 90.2,33.8 85.73,29.33 arc(85.7,29.31) 85.66,29.3 74.2,29.3 J102.1
N13254239: length 16.4
  BOTTOM w1.5: J107.1 48.18,50.1 43.18,55.1 J105.3
N13254275: length 27
  TOP w0.2: C120.1 78.76,42.01 arc(78.79,42.09) 78.87,42.11 79.05,42.3 82.21,42.3 84.13,40.38 R120.2 84.27,40.38 84.97,39.68 84.97,37.18 84.17,36.38 R121.1 84.1,35.5 81.47,32.87 73.83,32.87 72.88,33.82 arc(72.85,33.84) 72.81,33.85 U103.7
N13254303: length 20.6
  TOP w0.2: R118.1 68.02,36.88 68.2,36.7 70.67,36.7 70.95,36.98 ; v1(70.95,40.25) L102.2 70.95,36.98 ; 70.95,36.98 71.27,36.67 arc(71.29,36.63) 71.3,36.6 U103.8 C116.2 ; v1(75.75,40.25) 75.75,39.54 76.1,39.19 C115.1
  BOTTOM w0.2: v1(70.95,40.25) v1(75.75,40.25)
N13254321: length 22.3
  TOP w0.2: 80.44,30 C119.2 v1(81.6,31.2) ; 80.44,30 C118.1 ; 80.44,30 78.24,30 arc(78.2,30.01) 78.17,30.03 76.43,31.77 arc(76.4,31.79) 76.36,31.8 D105.3 72.57,31.8 71.82,32.55 U103.5 ; v1(82,35.8) 82,35.01 81.09,34.1 C121.2
  BOTTOM w0.2: v1(81.6,31.2) 80.59,32.21 arc(80.57,32.24) 80.56,32.28 80.56,34.62 arc(80.57,34.66) 80.59,34.69 81.05,35.15 81.35,35.15 v1(82,35.8)
N13254399: length 38.3
  TOP w0.2: v1(87,39.3) 87,37.69 84.1,34.79 C123.2 82.54,33.24 81.61,32.3 79.33,32.3 arc(79.3,32.29) 79.26,32.27 78.96,31.97 C119.1 78.95,31.2 77.78,32.37 73.23,32.37 72.4,33.2 U103.6 ; R119.1 80.22,38.89 80.24,38.91 80.24,39.8 ; 80.24,39.8 C120.2 82.2,41.3 83.38,40.12 83.38,39.84 84.1,39.12 R121.2 ; 80.24,39.8 v1(82.2,39.8)
  BOTTOM w0.2: v1(82.2,39.8) 86.5,39.8 v1(87,39.3)
N13254415: length 46.6
  TOP w1: 42.4,17.43 42.4,14.64 arc(42.39,14.6) 42.37,14.57 41.43,13.63 arc(41.4,13.61) 41.36,13.6 25.14,13.6 arc(25.1,13.61) 25.07,13.63 22.63,16.07 arc(22.6,16.09) 22.56,16.1 L101.2 ; 42.4,17.43 41.42,18.41 ; 42.4,17.43 44.7,15.13 arc(44.73,15.11) 44.77,15.1 C109.2 ; U102.2 41.35,18.44 arc(41.39,18.43) 41.42,18.41 ; 41.42,18.41 42,18.99 42,21.7 43.37,23.06 C108.2
N13254529: length 3.4
  TOP w0.2: C112.2 43.7,31.37 arc(43.73,31.36) 43.77,31.34 43.9,31.2 arc(43.93,31.18) 43.97,31.18 U101.10
N13254717: length 3.2
  TOP w0.305: R110.1 D103.1
N13254741: length 55.2
  TOP w0.305: Q101.1 92.9,20.5 91.8,21.6 v1(86.6,21.6) ; v1(65.5,17.9) 59.7,17.9 57.7,15.9 D103.2 54.9,17.38 arc(54.89,17.42) 54.87,17.45 54.11,18.22 arc(54.08,18.24) 54.04,18.25 53.78,18.5 47.42,18.5 47.17,18.25 R109.2
  BOTTOM w0.305: v1(86.6,21.6) 79.9,21.6 76.2,17.9 v1(65.5,17.9)
N13254867: length 30.3
  TOP w0.305: Q102.1 78,21.4 77.3,22.1 v1(74.7,22.1) ; R111.2 66.75,18.1 ; 66.75,18.1 66.75,20.45 v1(66.8,20.5) ; 66.75,18.1 arc(66.75,18.14) 66.73,18.17 64.03,20.87 arc(64,20.89) 63.96,20.9 D104.2
  BOTTOM w0.305: v1(66.8,20.5) 66.8,21 67.9,22.1 v1(74.7,22.1)
N13254889: length 18
  TOP w0.2: C103.2 19.73,45.94 19.88,45.8 v1(21.2,45.8) ; U100.3 30.3,48.54 30.25,48.6 R100.1
  BOTTOM w0.2: U100.3 28.83,45.83 arc(28.8,45.81) 28.76,45.8 v1(21.2,45.8)
N13255179: length 9.1
  TOP w0.2: J102.2 75,25 75.7,25.7 75.7,28.69 73.89,30.5 D105.1
N13255229: length 10.8
  TOP w0.305: D104.1 60.6,15.57 arc(60.59,15.53) 60.57,15.5 59.47,14.41 arc(59.44,14.38) 59.4,14.38 59.03,14 52.38,14 51.8,14.58 R116.1
N13255269: length 11.2
  TOP w0.305: 46.2,20.9 R109.1 ; 46.2,20.9 46.13,20.97 arc(46.1,20.99) 46.06,21 v1(44,21) ; 46.2,20.9 R110.2
  BOTTOM w0.305: v1(44,21) 43.25,20.25 arc(43.22,20.23) 43.18,20.23 40.8,20.23 arc(40.76,20.23) 40.73,20.25 U102.3
N13255311: length 6
  TOP w1.5: C111.2 93.2,35.5 J101.2
N13255335: length 5.5
  TOP w0.2: R102.1 77.52,45.93 arc(77.53,45.97) 77.55,46 78.19,46.64 arc(78.21,46.67) 78.22,46.71 78.22,49.34 arc(78.21,49.38) 78.19,49.41 SW100.1
N13255523: length 6.8
  TOP w0.2: R104.2 33.88,36.55 arc(33.87,36.59) 33.85,36.62 33.78,36.69 arc(33.76,36.73) 33.75,36.76 Q100.1 arc(33.79,38.31) 33.81,38.33 34.36,38.87 arc(34.39,38.89) 34.43,38.9 36.74,38.9 arc(36.78,38.91) 36.81,38.93 37.05,39.17 arc(37.08,39.19) 37.12,39.2 R108.2
N13255625: length 99.2
  TOP w1.2: C109.1 47.74,16.19 ; 44.3,25.7 45.1,24.9 C108.1
  TOP w1.5: J101.1 85.24,27.1 82.6,24.46 82.6,17.3 ; 44.3,25.7 42.18,25.7 U102.4 ; v1(48.7,17.2) 47.76,16.26 arc(47.74,16.23) 47.74,16.19 ; 82.6,17.3 82.6,9.36 81.8,8.56 arc(81.79,8.52) 81.77,8.49 81.29,8.01 arc(81.26,7.99) 81.22,7.98 Q102.2 68.46,7.98 arc(68.42,7.99) 68.39,8.01 v1(67.2,9.2) ; 82.6,17.3 83,16.9 Q101.3
  BOTTOM w1.5: 48.7,22 53.46,22 arc(53.5,21.99) 53.53,21.97 58.97,16.53 arc(59,16.51) 59.04,16.5 59.34,16.2 66,16.2 67.17,15.03 arc(67.19,15) 67.2,14.96 v1(67.2,9.2) ; 48.7,22 47.21,23.49 arc(47.18,23.51) 47.14,23.52 U102.4 ; 48.7,22 v1(48.7,17.2)
N13255733: length 14.4
  TOP w0.2: v1(70.2,35.7) 69,34.5 U103.1 U103.2 ; v1(72.5,35.7) 73.24,35.7 73.37,35.56 76.01,35.56 78.58,38.13 R119.2
  BOTTOM w0.2: v1(70.2,35.7) v1(72.5,35.7)
N13255819: length 5
  TOP w0.2: R122.1 61.14,45.7 arc(61.1,45.69) 61.07,45.67 J104.6
N13255963: length 14.3
  TOP w1: D102.1 27,27.1 arc(26.96,27.09) 26.92,27.07 25.88,26.03 arc(25.85,26.01) 25.81,26 L101.1
N13256241: length 8.4
  TOP w0.2: 72.22,46.53 71.64,46.53 arc(71.6,46.53) 71.57,46.55 70.35,47.77 arc(70.32,47.79) 70.28,47.8 R107.2 ; 72.22,46.53 R105.1 ; 72.22,46.53 72.47,46.78 arc(72.49,46.81) 72.5,46.85 SW100.3
N13256275: length 18.2
  TOP w0.2: v1(59.2,37.8) R115.1 ; U101.4 48.52,35.07 50.3,33.3 v1(50.3,32.4)
  BOTTOM w0.2: v1(50.3,32.4) 53.76,32.4 arc(53.8,32.41) 53.83,32.43 v1(59.2,37.8)
N13256585: length 7.1
  TOP w0.2: U102.6 27.91,16.51 arc(27.88,16.49) 27.84,16.48 R112.1
N13256589: length 6.2
  TOP w0.2: R114.1 30.1,21.28 arc(30.14,21.29) 30.17,21.31 U102.5
N13257127: length 3.8
  TOP w0.2: Q100.3 34.18,39.6 arc(34.14,39.61) 34.11,39.63 33.47,40.27 arc(33.45,40.3) 33.44,40.34 R103.2
N13257143: length 8.1
  TOP w0.2: v1(35.4,43.9) 35.36,43.86 35.36,42.6
  BOTTOM w0.2: v1(35.4,43.9) 36.13,43.9 37.53,45.29 37.53,47.74 D101.C
N13257239: length 9.5
  TOP w0.2: J106.2 66.16,53.12 65.21,52.17 61.53,52.17 61.46,52.1 arc(61.42,52.11) 61.39,52.13 61.33,52.19 arc(61.31,52.22) 61.3,52.26 R125.2
N13257243: length 4.1
  TOP w0.2: R127.2 64.6,55.58 arc(64.59,55.62) 64.57,55.65 J106.3
N13257333: length 5.5
  TOP w0.2: R101.2 39.75,44.47 arc(39.76,44.51) 39.78,44.54 41.54,46.3 arc(41.57,46.32) 41.61,46.33 D100.A
N13257345: length 20.2
  TOP w1: J100.1 9.4,47.56 arc(9.41,47.53) 9.43,47.49 14.19,42.73 arc(14.23,42.71) 14.26,42.7 L100.1
N13257381: length 14.1
  TOP w0.2: J104.5 55.66,41.44 57.1,40 61.82,40 62.13,40.31 63.78,40.31 64.09,40 65.35,40 66.83,41.48 R123.1
N13257397: length 14.2
  TOP w0.2: J104.3 48.91,44.47 arc(48.88,44.49) 48.84,44.5 44.04,44.5 arc(44,44.49) 43.97,44.47 41.71,42.21 arc(41.69,42.18) 41.68,42.14 R124.1
N13257431: length 10
  TOP w0.2: v1(52.7,40.5) 55.58,40.5 arc(55.62,40.49) 55.65,40.47 56.17,39.95 arc(56.19,39.92) 56.2,39.88 R126.1
  BOTTOM w0.2: v1(52.7,40.5) 50.38,40.5 arc(50.34,40.51) 50.31,40.53 J104.2
N13260157: length 14
  TOP w0.2: R117.1 51.62,24 arc(51.58,24.01) 51.55,24.03 50.06,25.52 arc(50.03,25.56) 50.03,25.59 50.03,31.07 48.8,32.3 48.8,33.1 47.47,34.43 U101.5

## Copper pours and planes (outline as drawn; the poured copper is in the pictures)
GND on TOP: 2,2 2,60 97.9,60 97.9,2 ; 30 cut-outs
GND on BOTTOM: 2,2 2,60 97.9,60 97.9,2 ; 6 cut-outs

## Text on the board
USER_PART_NUM_TOP: FIGURE | SIZE | 2.5999 | 1.397 | 1.1176 | 1.1001 | 1.0668 | 1.0 | 0.95 | 0.9144 | 0.6599 | 3.175 | DRILL CHART: TOP to BOTTOM | ALL UNITS ARE IN MILLIMETERS | PLATED | NON-PLATED | QTY | 6 | 3 | 4 | 22 | 10 | 110
